# Altium PCB machin_2022-02-20.pcbdoc
Units mm, origin at the board's own origin, x right, y up, seen from the top; angles counter-clockwise.
Board outline 154.69 x 83.82 mm, 2 copper layers (Top Layer, Bottom Layer); 35 components, 37 nets, 183 pads, 2 vias.
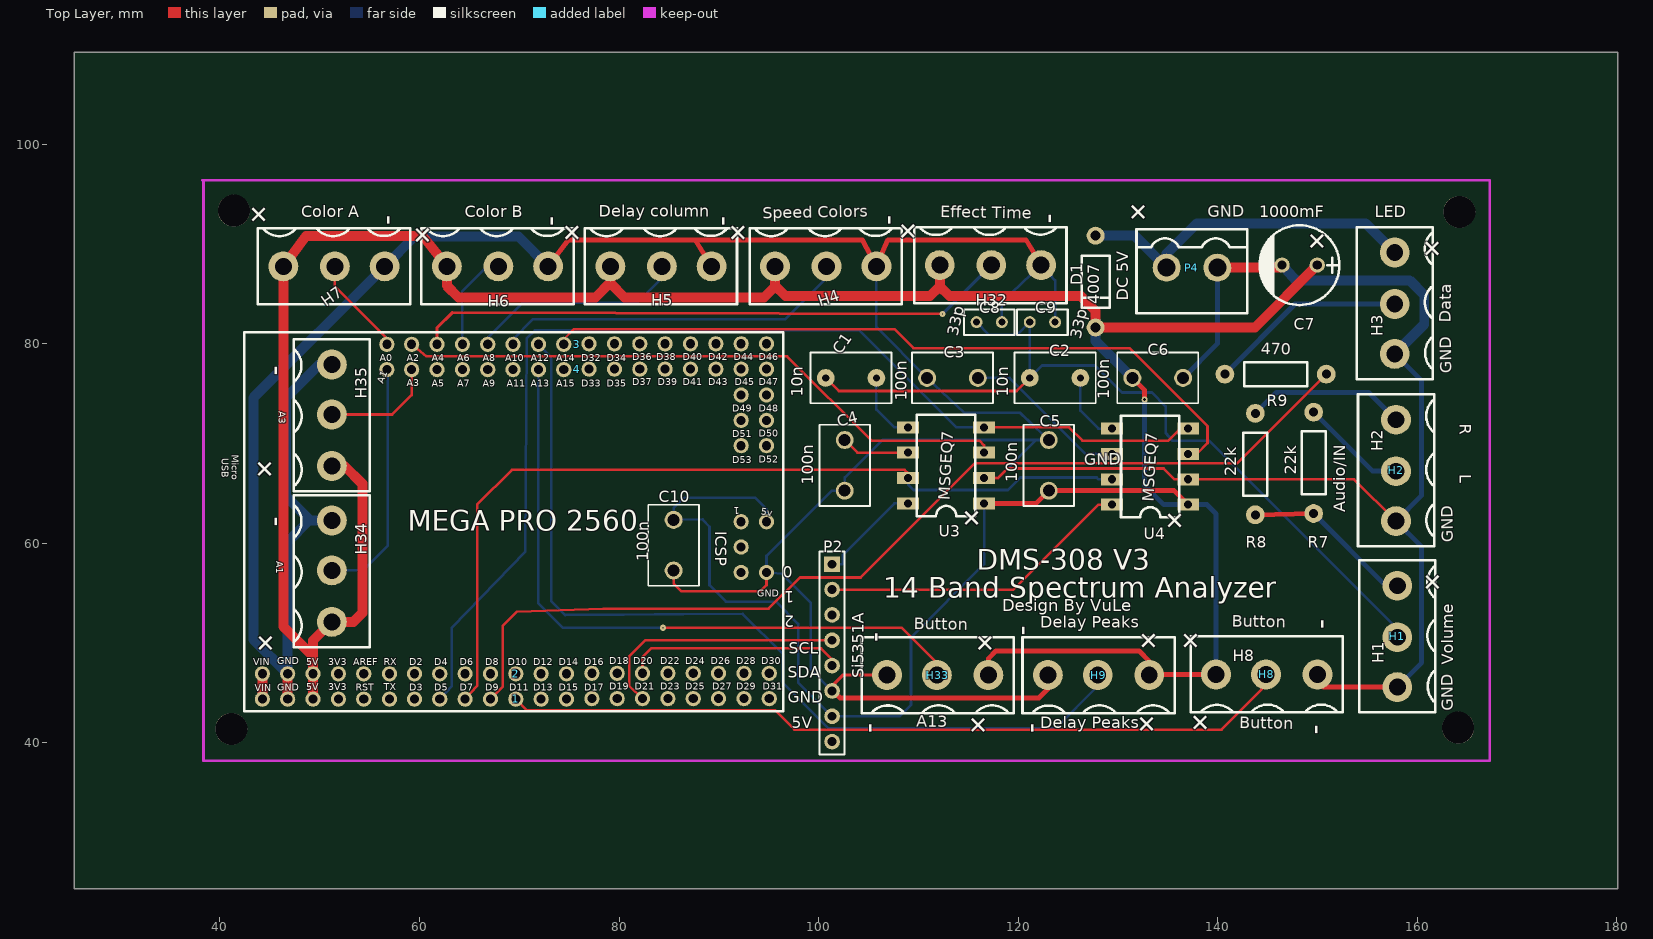
[diagram p0: Top Layer view]
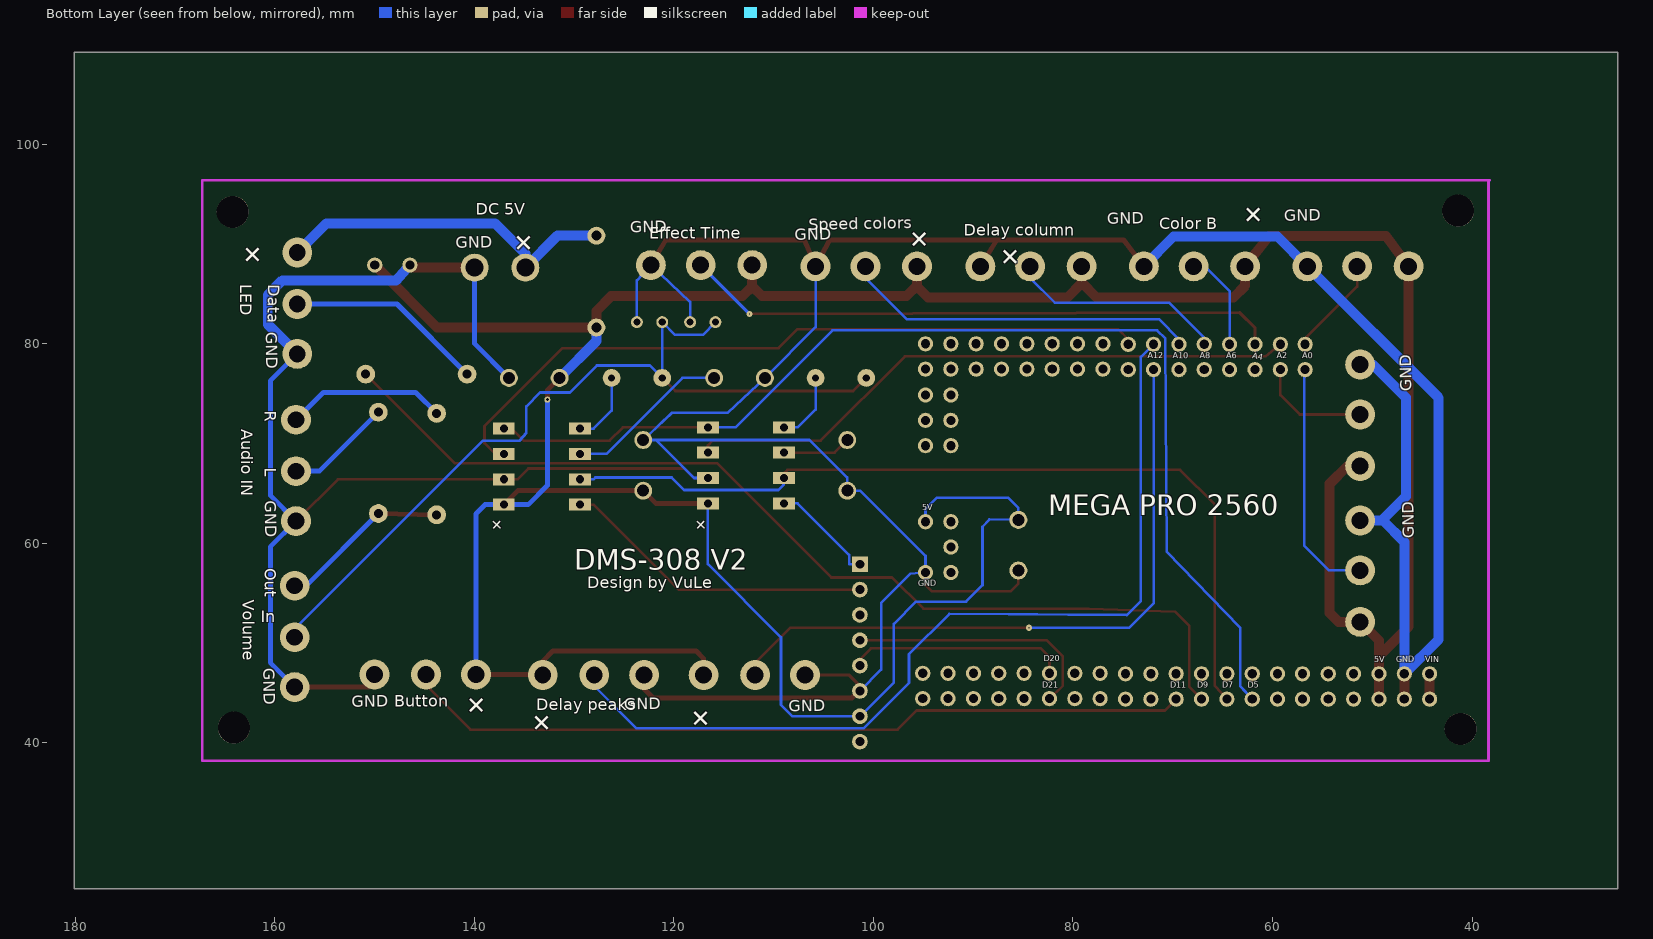
[diagram p1: Bottom Layer view, seen from below]

## Layer stack, top to bottom
Top Layer: signal copper (thickness not stored)
Dielectric: dielectric 0.32, FR-4, Dk 4.8
Bottom Layer: signal copper (thickness not stored)

## Board outline
180.086,25.4 25.4,25.4 25.4,109.22 180.086,109.22

## Components (designator, comment, footprint, x,y, rotation, side; value= is the part's Value field where it differs from the comment)
1 "hole" ?#1 68.707,45.212 r90 top
2 "hole" ?#1 68.707,47.752 r90 top
3 "hole" ?#2 74.988,81.266 r90 top
4 "hole" ?#2 74.988,78.726 r90 top
C1 "10n" RAD-0.2#1 103.251,76.581 r0 top
C2 "10n" RAD-0.2#1 123.698,76.581 r0 top
C3 "100n" RAD-0.2#2 113.411,76.581 r270 top
C4 "100n" RAD-0.2#2 102.616,67.818 r0 top
C5 "100n" RAD-0.2#2 123.063,67.818 r180 top
C6 "100n" RAD-0.2#2 133.985,76.581 r90 top
C7 "1000m" CAP-D8.0XF3.5 148.209,87.884 r180 top
C8 "33p" RAD-0.1 117.094,82.169 r0 top
C9 "33p" RAD-0.1 122.428,82.169 r0 top
C10 "100n" RAD-0.2#2 85.471,59.817 r0 top
D1 "1N4007RLG" DO-41_BD2.4-L4.7-P8.70-D0.9-RD 127.762,86.233 r90 top
H1 "Volume" CONN-TH_WJ2EDGVC-5.08-3P 157.988,50.673 r90 top
H2 "Audio/IN" CONN-TH_WJ2EDGVC-5.08-3P 157.861,67.31 r90 top
H3 "LED" CONN-TH_WJ2EDGVC-5.08-3P 157.734,84.074 r90 top
H4 "Speed" CONN-TH_WJ2EDGVC-5.08-3P 100.711,87.757 r180 top
H5 "Delay" CONN-TH_WJ2EDGVC-5.08-3P 84.201,87.757 r180 top
H6 "Collor B" CONN-TH_WJ2EDGVC-5.08-3P 67.818,87.757 r180 top
H7 "Collor A" CONN-TH_WJ2EDGVC-5.08-3P 51.435,87.757 r180 top
H8 "Button" CONN-TH_WJ2EDGVC-5.08-3P 144.907,46.863 r0 top
H9 "Delay Peaks" CONN-TH_WJ2EDGVC-5.08-3P 128.052,46.802 r0 top
H32 "Speed" CONN-TH_WJ2EDGVC-5.08-3P 117.221,87.884 r180 top
H33 "Delay Peaks" CONN-TH_WJ2EDGVC-5.08-3P 111.923,46.803 r0 top
H34 "Collor A" CONN-TH_WJ2EDGVC-5.08-3P 51.217,57.216 r270 top
H35 "Collor A" CONN-TH_WJ2EDGVC-5.08-3P 51.217,72.837 r270 top
P2 "Si5351A" HDR-8X1/2.54 101.346,49.022 r270 top
P4 "DC/5V" CONN-TH_P5.08_KF2EDGVC-5.08-2P 137.414,87.63 r0 top
R7 "22k" AXIAL-0.4 149.606,68.072 r90 top
R8 "22k" AXIAL-0.4 143.764,67.945 r90 top
R9 "470" AXIAL-0.4 145.796,76.962 r0 top
U3 "MSGEQ7" DIL-08 112.776,67.818 r90 top
U4 "MSGEQ7" DIL-08 133.223,67.691 r90 top

## Footprints (in the part's own frame and the unit in brackets; to place one, negate y for a bottom-side part, rotate by r counter-clockwise, add the part's x,y. Pads: shape width x height; smd on the part's side, far side on the other; paste and mask are expansions set on the pad)
AXIAL-0.4 [mil]
  round 74 hole 35.4: 1(-200,0) 2(200,0)
  silkscreen extent -124,-47 124,47
CAP-D8.0XF3.5 [mil]
  round 60 hole 36: 1(-69.25,0) 2(69.25,0)
  silkscreen extent -157,-157 161,158
CONN-TH_P5.08_KF2EDGVC-5.08-2P [mm]
  round 2.8 hole 1.8: 1(-2.54,0) 2(2.54,0)
  silkscreen extent -5.56,-4.55 5.56,3.85
CONN-TH_WJ2EDGVC-5.08-3P [mm]
  round 3 hole 1.7: 1(-5.08,0) 2(-0.081,0) 3(5.08,0)
  silkscreen extent -7.62,-3.81 7.62,3.81
DIL-08 [mil]
  rect 47.7x85.9 hole 32: 1(-150,-150) 2(-50,-150) 3(50,-150) 4(150,-150) 5(150,150) 6(50,150) 7(-50,150) 8(-150,150)
  silkscreen extent -200,-115 200,115
DO-41_BD2.4-L4.7-P8.70-D0.9-RD [mm]
  round 1.8 hole 1: 1(-4.6,0) 2(4.6,0)
  silkscreen extent -2.6,-1.4 2.6,1.4
HDR-8X1/2.54 [mil]
  rect 62x62 hole 35: 1(-350,0)
  round 62 hole 35: 2(-250,0) 3(-150,0) 4(-50,0) 5(50,0) 6(150,0) 7(250,0) 8(350,0)
  silkscreen extent -400,-50 400,50
RAD-0.1 [mil]
  round 47 hole 28: 1(-50,0) 2(50,0)
  silkscreen extent -100,-50 100,50
RAD-0.2#1 [mil]
  round 70 hole 28: 1(100,0) 2(-100,0)
  silkscreen extent -160,-100 160,100
RAD-0.2#2 [mil]
  round 70.87 hole 47.24: 1(0,100) 2(0,-100)
  silkscreen extent -100,-160 100,160
?#1 [mil]
  round 60 hole 36: 1(-32.38,962.72) 3(-32.38,460.75) 5(-32.38,662.72) 6(-32.38,562.72) 7(-32.38,362.72) 8(-32.38,262.72) 9(-32.38,162.72) 10(-32.38,62.72) 11(-32.38,-37.28) 12(-32.38,-137.28) 13(-32.38,-237.28) 14(-30.41,-337.28) 15(-30.41,-437.28) 16(-30.41,-537.28) 17(-30.41,-637.28) 18(-30.41,-737.28) 19(-30.41,-837.28) 20(-30.41,-937.28) 21(-30.41,-1037.28) GND(-32.38,862.72) VCC(-32.38,762.72)
?#2 [mil]
  round 60 hole 36: 3(-51.83,718.88) 7(-51.83,620.85) 8(-51.83,520.85) 9(-51.83,420.85) 10(-51.83,320.85) 11(-51.83,220.85) 12(-51.83,120.85) 13(-51.83,20.85) 14(-49.86,-79.15) 15(-49.86,-179.15) 16(-49.86,-279.15) 17(-49.86,-379.15) 18(-49.86,-479.15) 19(-49.86,-579.15) 20(-49.86,-679.15) 21(-49.86,-779.15)

## Free pads (board coordinates)
  round 1.524 hole 0.914: 20(92.238,57.089) 20(92.238,59.629) 20(92.238,62.169) 20(92.238,69.789) 20(92.238,72.329) 20(92.238,74.869) 21(94.778,69.789) 21(94.778,72.329) 21(94.778,74.869) GND(94.778,57.089) VCC(94.778,62.169)
  round 3.2 hole 3.2 unplated: ""(41.148,41.402) ""(41.402,93.345) ""(164.084,41.529) ""(164.211,93.218)
  round 0.61 hole 0.31: ""(132.677,74.399)

## Via types
v1: diameter 0.61, hole 0.1, Top Layer to Bottom Layer, tented both sides, 2 vias

## Nets (pads, with @x,y where several pads share a name; then routed paths per layer and width w, separated by ;. In a path a pad name is that pad's centre, name@x,y a point inside that pad or via, vN(x,y) a via of type N, cw(c..) or ccw(c..) an arc to the next point about the centre after c; other vN are vias at no path point)
A1: 4.3 H34.2 | length 24.3
  Bottom Layer w0.26: H34.2 54.347,57.297 56.805,59.756 56.805,77.333 4.3
A3: 4.7 H35.2 | length 11.3
  Top Layer w0.26: H35.2@51.218,72.919 57.268,72.919 59.219,74.87 4.7@59.219,77.41
C1_1: C1.1 U3.5 | length 7.1
  Bottom Layer w0.26: C1.1 105.791,73.419 107.582,71.628 U3.5
C1_2: C1.2 C2.2 C8.1 C9.1 H1.2 | length 84.2
  Top Layer w0.26: C1.2 102.024,75.268 119.845,75.268 C2.2
  Bottom Layer w0.26: C8.1 117.094,80.899 119.888,80.899 C9.1 C2.2 ; C2.2 122.404,77.829 127.715,77.829 130.42,75.124 133.387,75.124 134.784,73.727 134.784,71.06 135.437,70.298 139.1,70.298 157.987,51.41 H1.2
C2_1: C2.1 U4.5 | length 7.2
  Bottom Layer w0.26: C2.1 126.238,73.292 128.029,71.501 U4.5
C3_1: C3.1 U4.6 | length 16.6
  Bottom Layer w0.26: C3.1 119.136,76.581 126.756,68.961 U4.6
C4_1: C4.1 U3.6 | length 6.9
  Top Layer w0.26: C4.1 103.886,69.088 U3.6
GND: 1.GND 2.GND C3.2 C4.2 C5.2 C6.2 C7.2 C8.2 C9.2 C10.2 H1.1 H2.1 H3.1 H4.1 H5.1 H6.1 H7.1 H8.3 H9.1 H32.1 H33.1 H34.1 H35.1 P2.6 P4.2 pad.GND U3.2 U4.2 | length 444.4
  Top Layer w0.26: C10.2 85.47,55.982 86.27,55.185 94.144,55.185 94.779,55.82 pad.GND@94.779,57.09 ; U3.2 117.97,66.548 ; U3.2 117.97,66.548 ; 135.648,66.422 134.566,67.504 118.924,67.504 117.97,66.548 ; 135.649,66.421 U4.2 153.67,66.421 H2.1
  Top Layer w0.32: P2.6 101.346,45.751 102.398,46.802 H33.1
  Top Layer w0.5: H6.1 74.93,90.424 87.605,90.424 ; 87.63,90.424 87.605,90.424 ; 87.655,90.424 104.379,90.424 H4.1 106.934,90.424 120.777,90.424 H32.1 ; H5.1 87.605,90.424 ; P2.6 102.145,44.517 122.084,44.517 122.973,45.406 H9.1@122.973,46.803 ; H8.3 149.986,46.203 150.598,45.594 H1.1
  Top Layer w1: 1.GND 2.GND ; P4.2 146.197,87.63 C7.2
  Bottom Layer w0.26: pad.GND 94.778,58.74 101.316,65.278 C4.2 ; pad.GND@94.779,57.09 96.303,56.963 99.224,54.039 99.222,47.336 P2.6 ; C4.2 102.623,66.612 106.405,70.359 C5.2 120.178,73.091 114.59,73.091 C3.2 ; H4.1 105.791,81.661 C3.2 ; U3.2 117.173,66.548 117.97,66.548 120.147,68.725 121.78,70.358 C5.2 ; C8.2 118.364,84.201 H32.1 123.698,86.36 C9.2
  Bottom Layer w0.5: C6.2 139.954,80.01 P4.2 ; H3.1 160.438,76.29 160.438,64.806 H2.1 160.438,59.653 160.438,48.042 H1.1
  Bottom Layer w1: H35.1@51.218,77.918 49.956,77.92 46.646,74.628 46.646,64.71 49.059,62.297 51.218,62.297 48.932,62.297 46.794,60.158 2.GND 43.344,50.379 43.344,74.588 H7.1 59.501,90.745 69.91,90.745 H6.1 ; C7.2 147.827,86.361 159.234,86.361 160.692,84.903 160.692,81.951 H3.1
H2_2: H2.2 R7.2 | length 10.7
  Bottom Layer w0.5: R7.2 155.529,67.229 H2.2
H2_3: H2.3 R8.2 | length 16.1
  Bottom Layer w0.5: R8.2 145.861,75.124 155.127,75.124 H2.3
H3_2: H3.2 R9.1 | length 19.9
  Bottom Layer w0.5: R9.1 147.747,83.993 H3.2
P2_3: P2.3
P2_8: P2.8
POWER: D1.2 H3.3 P4.1 | length 35.2
  Bottom Layer w1: D1.2 131.671,90.833 P4.1 134.874,89.027 137.922,92.075 154.813,92.075 H3.3
R7_1: H1.3 R7.1 R8.1 | length 17.2
  Top Layer w0.5: R8.1 R7.1
  Bottom Layer w0.5: R7.1 156.845,55.753 H1.3
S$9494: 3.13
S$9498: 3.8 | length 53
  Top Layer w0.32: 3.8 61.758,81.601 63.282,83.125 112.431,82.998
S$10486: 4.12 | length 36.9
  Bottom Layer w0.26: 4.12@71.919,77.41 71.919,53.981 74.353,51.547 84.386,51.547
U1_5: U3.4 U4.4 | length 111.3
  Top Layer w0.26: U3.4 125.109,71.629 126.44,70.298 135.043,70.298 136.252,71.507 U4.4
  Bottom Layer w0.26: 62.034,44.39 63.24,45.726 63.24,51.547 70.611,59.183 70.738,80.519 71.566,81.347 104.111,81.347 113.829,71.629 U3.4
U1_7: U3.7 U4.7 | length 87.1
  Top Layer w0.26: 64.574,44.39 65.775,45.721 65.775,63.9 69.252,67.377 108.62,67.377 108.965,67.031 U3.7
  Bottom Layer w0.26: U3.7 109.002,65.852 109.516,65.345 118.963,65.345 120.215,66.597 127.855,66.597 128.028,66.422 ; 128.029,66.421 U4.7
U1_9: R9.2 | length 100.7
  Top Layer w0.26: 67.114,44.39 68.363,45.639 68.363,51.756 69.76,53.153 78.404,53.452 95,53.452 98.129,56.582 104.203,56.582 115.633,68.012 141.924,68.012 R9.2
U1_11: H8.2 | length 79.3
  Top Layer w0.26: 69.654,44.39 70.797,43.249 95.673,43.249 97.581,41.342 140.372,41.342 144.825,45.794 H8.2
U1_20: P2.5 | length 22
  Top Layer w0.26: 82.354,46.981 82.354,48.601 83.222,49.47 100.24,49.47 101.345,48.362 P2.5
U1_21: P2.4 | length 25.8
  Top Layer w0.26: 82.354,44.438 81.02,45.726 81.02,48.665 82.648,50.293 P2.4
U1_54: U4.3 | length 73.6
  Top Layer w0.26: 74.457,79.95 74.457,80.455 75.475,81.474 107.604,81.474 109.511,79.569 131.17,79.569 138.973,71.766 138.974,70.043 137.893,68.962 U4.3
U1_56: U3.3 | length 62.2
  Top Layer w0.26: 59.219,79.95 60.705,78.741 96.852,78.741 105.295,70.298 116.113,70.298 116.585,69.825 U3.3
U1_58: H7.2 | length 10
  Top Layer w0.26: H7.2 51.515,85.746 56.727,80.534 56.727,79.95
U1_60: H6.2 | length 10
  Bottom Layer w0.26: 64.297,79.95 64.297,85.281 66.768,87.755 H6.2
U1_62: H5.2 | length 21.7
  Bottom Layer w0.26: 66.839,79.95 66.839,80.585 70.377,84.123 81.823,84.123 84.286,86.605 H5.2
U1_64: H4.2 | length 35.6
  Bottom Layer w0.26: 69.377,79.95 69.374,80.443 71.386,82.475 96.669,82.475 100.791,86.597 H4.2
U1_66: H9.2 | length 90.9
  Bottom Layer w0.26: 71.919,79.95 73.189,78.68 73.189,54.237 74.607,52.817 92.387,52.944 96.43,48.901 96.43,46.005 100.967,41.469 123.735,41.469 127.972,45.705 H9.2@127.972,46.803
U1_67: H33.2 | length 30.1
  Top Layer w0.26: v1(84.386,51.548) 108.32,51.547 111.843,48.027 H33.2@111.843,46.803
U1_68: H32.2 | length 6.9
  Bottom Layer w0.32: v1(112.431,82.998) H32.2
U3_8: P2.1 U3.8 | length 10.7
  Bottom Layer w0.26: P2.1 102.425,57.912 102.425,58.852 107.582,64.008 U3.8
U4_8: P2.2 U4.8 | length 31.6
  Top Layer w0.26: P2.2 119.52,55.372 128.029,63.881 U4.8
VCC: 1.VCC 2.VCC C5.1 C6.1 C7.1 C10.1 D1.1 H4.3 H5.3 H6.3 H7.3 H8.1 H9.3 H32.3 H33.3 H34.3 H35.3 P2.7 pad.@132.677,74.399 pad.VCC U3.1 U4.1 | length 371.6
  Top Layer w0.5: U3.1 121.793,64.008 C5.1 ; H33.3 117.003,48.454 117.765,49.216 132.116,49.216 133.132,48.199 H9.3 133.132,46.863 H8.1 ; C5.1 135.635,65.279 U4.1 ; C6.1 132.677,75.349 pad.@132.677,74.399
  Top Layer w1: H7.3 46.354,51.664 49.334,48.685 2.VCC 1.VCC ; H7.3 48.641,90.805 60.325,90.805 H6.3 ; 2.VCC 49.334,50.253 H34.3 ; H34.3@51.218,52.137 53.377,52.137 54.266,53.026 54.266,65.98 52.488,67.758 H35.3@51.218,67.758 ; H6.3 62.737,85.827 63.918,84.649 77.634,84.649 79.12,86.135 H5.3 79.12,86.081 80.555,84.649 94.525,84.649 95.63,85.754 H4.3 95.63,85.827 96.684,84.776 111.162,84.776 112.14,85.756 ; 112.141,85.756 H32.3 ; D1.1 127.761,83.287 126.273,84.776 113.121,84.776 112.14,85.756 ; D1.1 143.717,81.633 C7.1@149.968,87.884 ; 112.14,85.756 H32.3 112.14,85.756 ; 95.631,85.754 H4.3 95.631,85.754
  Bottom Layer w0.26: pad.VCC@94.779,62.17 94.779,63.44 93.636,64.583 86.524,64.583 85.47,63.531 C10.1 88.378,62.411 89.064,61.662 89.064,55.817 90.715,54.169 95.711,54.169 97.954,51.926 97.954,46.064 P2.7 108.124,42.673 109.255,43.803 109.255,50.582 116.585,57.913 U3.1 ; U4.1 U4.1@137.724,63.881
  Bottom Layer w0.5: pad.@132.676,74.4 132.676,65.799 134.594,63.882 U4.1 138.914,63.882 139.826,62.967 H8.1
  Bottom Layer w1: D1.1 127.762,80.264 C6.1
VIN: 1.1 2.1 | length 2.5
  Top Layer w1: 1.1 2.1
pads on no net: 1.3 1.5 1.6 1.7 1.8 1.9 1.10 1.11 1.12 1.13 1.14 1.15 1.16 1.17 1.18 1.19 1.20 1.21 2.3 2.5 2.6 2.7 2.8 2.9 2.10 2.11 2.12 2.13 2.14 2.15 2.16 2.17 2.18 2.19 2.20 2.21 3.3 3.7 3.9 3.10 3.11 3.12 3.14 3.15 3.16 3.17 3.18 3.19 3.20 3.21 4.8 4.9 4.10 4.11 4.13 4.14 4.15 4.16 4.17 4.18 4.19 4.20 4.21

## Polygon pours and split planes (outlines as drawn)
GND on Top Layer (solid): 38.263,96.459 167.295,96.459 167.295,38.166 38.39,38.166 38.263,38.293 38.263,96.459 38.263,96.332
GND on Bottom Layer (solid): 38.263,96.459 167.295,96.459 167.295,38.166 38.39,38.166 38.263,38.293 38.263,96.332 38.263,96.459

## Silkscreen, mask and mechanical layers (free items; w line width, h text height)
Top Overlay:
  lines w0.254: 42.454,43.169 42.454,81.169 96.454,81.169 96.454,43.169 42.454,43.169
  text "+" at 133.47,92.986 h2.03 r135
  text "+" at 45.332,92.732 h2.03 r135
  text "+" at 109.173,92.732 h2.03 r225
  text "+" at 75.518,92.605 h2.03 r225
  text "+" at 92.155,92.605 h2.03 r225
  text "+" at 60.532,92.351 h2.03 r225
  text "Delay column" at 77.978,92.329 h2.03
  text "Color A" at 48.169,92.268 h2.03
  text "Color B" at 64.552,92.268 h2.03
  text "Effect Time" at 112.177,92.268 h2.03 r359
  text "GND" at 138.974,92.268 h2.03 r1
  text "1000mF" at 144.181,92.268 h2.03
  text "LED" at 155.738,92.268 h2.03
  text "Speed Colors" at 94.397,92.141 h2.03 r1
  text "-" at 123.988,92.014 h2.03 r90
  text "-" at 57.694,91.887 h2.03 r90
  text "-" at 107.859,91.887 h2.03 r90
  text "-" at 74.077,91.76 h2.03 r90
  text "-" at 91.222,91.76 h2.03 r90
  text "+" at 150.194,91.716 h2.03 r225
  text "+" at 162.934,89.303 h2.03 r135
  text "DC 5V" at 131.445,84.328 h2.03 r90
  text "4007" at 128.524,83.947 h2.03 r90
  text "Data" at 163.739,82.108 h2.03 r89
  text "33p" at 114.336,80.584 h2.03 r77
  text "33p" at 126.655,80.33 h2.03 r77
  text "470" at 144.308,78.552 h2.03 r359
  text "D36" at 81.316,78.373 h0.71
  text "D38" at 83.729,78.373 h0.71
  text "D40" at 86.396,78.373 h0.71
  text "D42" at 88.936,78.373 h0.71
  text "D44" at 91.476,78.373 h0.71
  text "D46" at 94.016,78.373 h0.71
  text "A0" at 56.043,78.246 h0.71
  text "A2" at 58.71,78.246 h0.71
  text "A4" at 61.25,78.246 h0.71
  text "A6" at 63.79,78.246 h0.71
  text "A8" at 66.33,78.246 h0.71
  text "A10" at 68.616,78.246 h0.71
  text "A12" at 71.156,78.246 h0.71
  text "A14" at 73.696,78.246 h0.71
  text "D32" at 76.236,78.246 h0.71
  text "D34" at 78.776,78.246 h0.71
  text "GND" at 163.866,77.028 h2.03 r91
  text "-" at 46.391,76.774 h2.03 r90
  text "A1" at 56.375,75.935 h0.71 r69
  text "D37" at 81.316,75.833 h0.71
  text "D39" at 83.856,75.833 h0.71
  text "D41" at 86.396,75.833 h0.71
  text "D43" at 88.936,75.833 h0.71
  text "D45" at 91.603,75.833 h0.71
  text "D47" at 94.016,75.833 h0.71
  text "A3" at 58.71,75.744 h0.71
  text "A5" at 61.25,75.706 h0.71
  text "A7" at 63.79,75.706 h0.71
  text "A9" at 66.33,75.706 h0.71
  text "A11" at 68.743,75.706 h0.71
  text "A13" at 71.156,75.706 h0.71
  text "A15" at 73.696,75.706 h0.71
  text "D33" at 76.236,75.706 h0.71
  text "D35" at 78.776,75.706 h0.71
  text "10n" at 98.806,74.676 h2.03 r90
  text "10n" at 119.38,74.676 h2.03 r90
  text "100n" at 129.54,74.422 h2.03 r90
  text "100n" at 109.22,74.295 h2.03 r90
  text "A3" at 45.909,73.218 h0.71 r270
  text "D48" at 94.016,73.204 h0.71
  text "D49" at 91.349,73.166 h0.71
  text "R" at 163.83,72.009 h2.03 r270
  text "D50" at 94.016,70.664 h0.71
  text "D51" at 91.349,70.626 h0.71
  text "H2" at 156.528,69.215 h1.14 r90
  text "Micro" at 41.21,68.9 h0.71 r270
  text "USB" at 40.194,68.519 h0.71 r270
  text "D52" at 94.016,68.086 h0.71
  text "D53" at 91.349,68.049 h0.71
  text "GND" at 126.619,67.437 h2.03 r1
  text "+" at 45.967,67.205 h2.03 r135
  text "L" at 163.83,66.929 h2.03 r270
  text "22k" at 148.245,66.868 h2.03 r90
  text "22k" at 142.276,66.741 h2.03 r90
  text "100n" at 120.305,66.106 h2.03 r90
  text "100n" at 99.858,65.852 h2.03 r90
  text "MSGEQ7" at 113.538,64.262 h2.03 r87
  text "MSGEQ7" at 133.985,64.135 h2.03 r87
  text "1" at 92.075,63.602 h0.71 r180
  text "Audio/IN" at 153.162,63.119 h2.03 r90
  text "5v" at 94.191,62.893 h0.71 r353
  text "+" at 116.797,62.313 h2.03 r135
  text "+" at 137.117,62.059 h2.03 r135
  text "-" at 46.391,61.661 h2.03 r90
  text "MEGA PRO 2560" at 58.837,61.28 h2.03
  text "ICSP" at 89.66,61.23 h1.14 r270
  text "GND" at 163.993,60.137 h2.03 r91
  text "A1" at 45.655,58.232 h0.71 r270
  text "100n" at 82.904,58.232 h1.14 r90
  text "0" at 97.409,57.721 h1.14 r180
  text "+" at 161.751,57.553 h2.03 r225
  text "DMS-308 V3" at 115.86,57.343 h2.03
  text "1" at 97.536,55.181 h1.14 r180
  text "GND" at 93.853,54.635 h0.71
  text "14 Band Spectrum Analyzer" at 106.462,54.549 h2.03
  text "Design By VuLe" at 118.4,53.187 h1.2
  text "2" at 97.536,52.768 h1.14 r180
  text "+" at 133.303,51.711 h2.03 r225
  text "+" at 137.494,51.711 h2.03 r225
  text "+" at 44.784,51.457 h2.03 r225
  text "+" at 116.92,51.457 h2.03 r225
  text "-" at 151.293,51.374 h2.03 r90
  text "Button" at 141.387,51.247 h2.03 r359
  text "Delay Peaks" at 122.21,51.12 h2.03
  text "Button" at 109.51,50.993 h2.03 r359
  text "-" at 121.321,50.739 h2.03 r90
  text "-" at 106.589,50.104 h2.03 r90
  text "SCL" at 97.028,48.958 h1.14
  text "H8" at 141.478,48.196 h1.14
  text "H1" at 156.655,48.006 h1.14 r90
  text "GND" at 45.756,47.893 h0.71
  text "D18" at 79.03,47.893 h0.71
  text "D20" at 81.443,47.893 h0.71
  text "D22" at 84.11,47.893 h0.71
  text "D24" at 86.65,47.893 h0.71
  text "D26" at 89.19,47.893 h0.71
  text "D28" at 91.73,47.893 h0.71
  text "D30" at 94.27,47.893 h0.71
  text "Volume" at 163.993,47.818 h2.03 r90
  text "AREF" at 53.376,47.804 h0.71
  text "VIN" at 43.343,47.766 h0.71
  text "5V" at 48.677,47.766 h0.71
  text "3V3" at 50.836,47.766 h0.71
  text "RX" at 56.424,47.766 h0.71
  text "D2" at 58.964,47.766 h0.71
  text "D4" at 61.504,47.766 h0.71
  text "D6" at 64.044,47.766 h0.71
  text "D8" at 66.584,47.766 h0.71
  text "D10" at 68.87,47.766 h0.71
  text "D12" at 71.41,47.766 h0.71
  text "D14" at 73.95,47.766 h0.71
  text "D16" at 76.49,47.766 h0.71
  text "SDA" at 96.901,46.545 h1.14
  text "Si5351A" at 104.902,46.482 h2.03 r90
  text "D19" at 79.03,45.353 h0.71
  text "D21" at 81.57,45.353 h0.71
  text "D23" at 84.11,45.353 h0.71
  text "D25" at 86.65,45.353 h0.71
  text "D27" at 89.317,45.353 h0.71
  text "D29" at 91.73,45.353 h0.71
  text "D31" at 94.397,45.353 h0.71
  text "5V" at 48.677,45.285 h0.71
  text "3V3" at 50.836,45.285 h0.71
  text "TX" at 56.424,45.264 h0.71
  text "GND" at 45.756,45.226 h0.71
  text "RST" at 53.63,45.226 h0.71
  text "D3" at 58.964,45.226 h0.71
  text "D5" at 61.504,45.226 h0.71
  text "D7" at 64.044,45.226 h0.71
  text "D9" at 66.584,45.226 h0.71
  text "D11" at 68.997,45.226 h0.71
  text "D13" at 71.41,45.226 h0.71
  text "D15" at 73.95,45.226 h0.71
  text "D17" at 76.49,45.226 h0.71
  text "VIN" at 43.47,45.158 h0.71
  text "GND" at 96.901,44.005 h1.14
  text "GND" at 163.993,43.246 h2.03 r91
  text "+" at 139.693,41.805 h2.03 r135
  text "+" at 134.359,41.678 h2.03 r135
  text "+" at 117.468,41.551 h2.03 r135
  text "5V" at 97.282,41.465 h1.14
  text "A13" at 109.764,41.214 h2.03 r359
  text "Delay Peaks" at 122.21,41.087 h2.03
  text "Button" at 142.149,41.087 h2.03 r359
  text "-" at 105.954,40.96 h2.03 r90
  text "-" at 122.21,40.96 h2.03 r90
  text "-" at 150.658,40.833 h2.03 r90
Bottom Overlay:
  text "DC 5V" at 139.863,92.522 h2.03
  text "GND" at 58.837,91.887 h2.03 r359
  text "GND" at 76.581,91.567 h2.03 r359
  text "+" at 62.147,91.484 h2.03 r315
  text "Color B" at 71.374,91.059 h2.03
  text "Speed colors" at 106.462,90.998 h2.03 r359
  text "GND" at 124.369,90.745 h2.03 r359
  text "Delay column" at 90.932,90.424 h2.03
  text "+" at 162.009,90.38 h2.03 r135
  text "+" at 136.482,90.341 h2.03 r45
  text "Effect Time" at 122.464,90.109 h2.03
  text "GND" at 107.859,89.983 h2.03 r359
  text "GND" at 141.859,89.154 h2.03 r359
  text "+" at 95.584,89.01 h2.03 r315
  text "+" at 87.714,88.944 h2.03 r45
  text "Data" at 161.036,85.979 h2.03 r91
  text "LED" at 163.83,85.979 h2.03 r90
  text "GND" at 161.29,81.153 h2.03 r89
  text "A0" at 57.023,78.359 h1 r1
  text "A2" at 59.563,78.359 h1
  text "A4" at 62.103,78.359 h1 r11
  text "A6" at 64.643,78.359 h1 r1
  text "A8" at 67.31,78.359 h1 r1
  text "A10" at 69.977,78.359 h1 r1
  text "A12" at 72.517,78.359 h1
  text "GND" at 45.629,75.25 h2.03 r269
  text "R" at 161.417,73.279 h2.03 r90
  text "Audio IN" at 163.739,71.44 h2.03 r90
  text "L" at 161.417,67.564 h2.03 r90
  text "GND" at 161.417,64.262 h2.03 r89
  text "5V" at 95.123,63.119 h1
  text "+" at 117.475,62.992 h2.03 r133
  text "+" at 137.922,62.992 h2.03 r133
  text "MEGA PRO 2560" at 82.459,62.804 h2.03
  text "GND" at 45.375,60.518 h2.03 r269
  text "Out" at 161.417,57.531 h2.03 r90
  text "DMS-308 V2" at 129.957,57.343 h2.03
  text "GND" at 95.504,55.499 h1 r359
  text "Design by VuLe" at 128.651,55.118 h2.03
  text "Volume" at 163.576,54.356 h2.03 r90
  text "In" at 161.417,51.689 h2.03
  text "D20" at 82.931,48.006 h1
  text "VIN" at 44.704,47.879 h1
  text "GND" at 47.625,47.879 h1 r359
  text "5V" at 49.784,47.879 h1
  text "GND" at 161.544,47.498 h2.03 r89
  text "D5" at 62.484,45.339 h1
  text "D7" at 65.024,45.339 h1
  text "D9" at 67.564,45.339 h1
  text "D11" at 70.231,45.339 h1
  text "D21" at 83.058,45.339 h1
  text "Button" at 147.991,43.246 h2.03
  text "GND" at 152.273,43.18 h2.03 r359
  text "GND" at 124.968,42.926 h2.03 r359
  text "Delay peaks" at 133.767,42.865 h2.03
  text "GND" at 108.494,42.738 h2.03 r359
  text "+" at 118.738,42.655 h2.03 r45
  text "+" at 139.998,42.335 h2.03 r315
  text "+" at 134.704,42.208 h2.03 r45
Document:
  lines w0.003: 102.743,67.31 102.743,67.31